# EAGLE board PinguiBot1.0 (EAGLE 5.11)
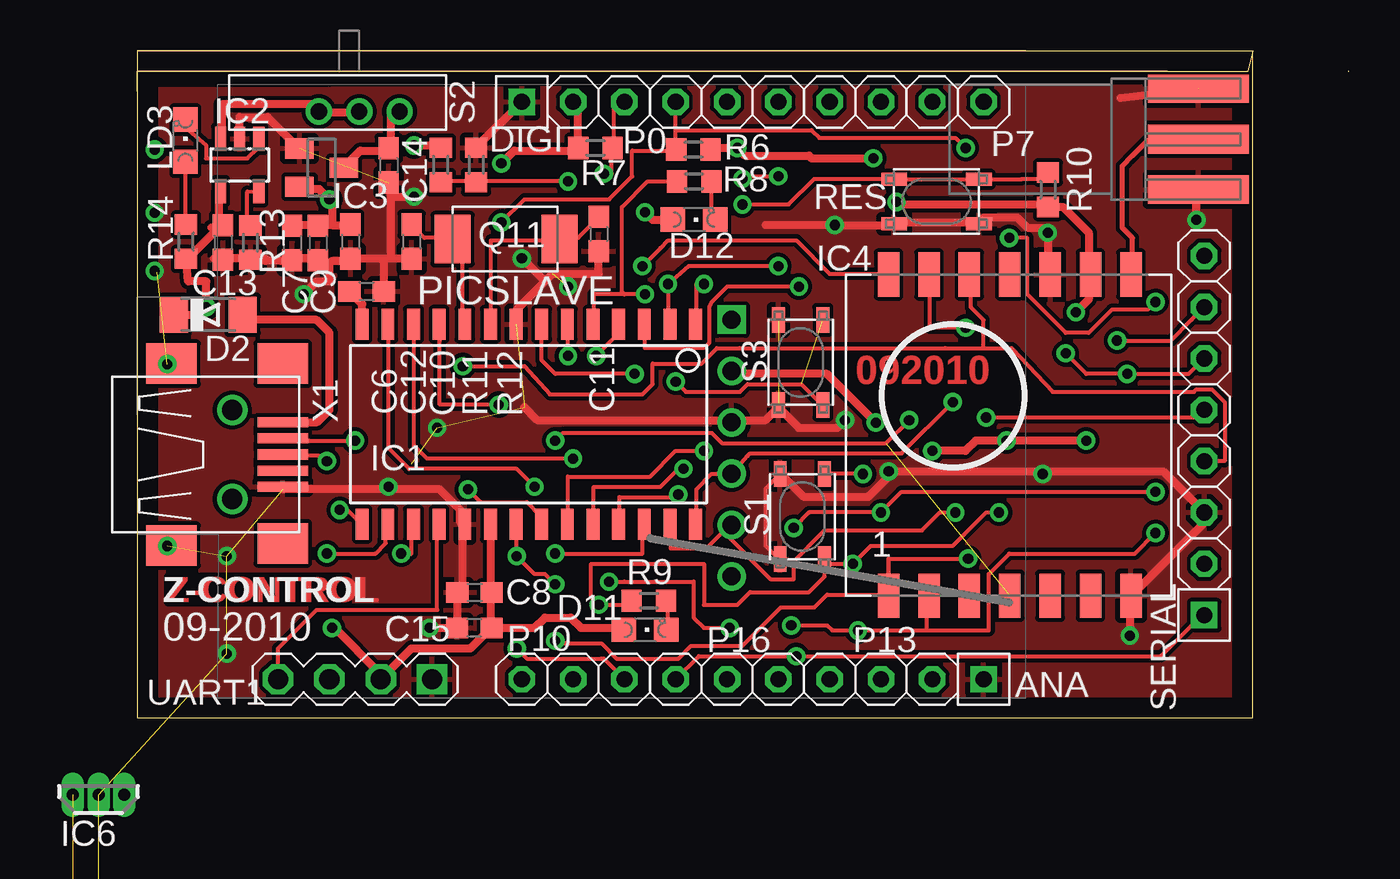
[diagram p0: board, top side]
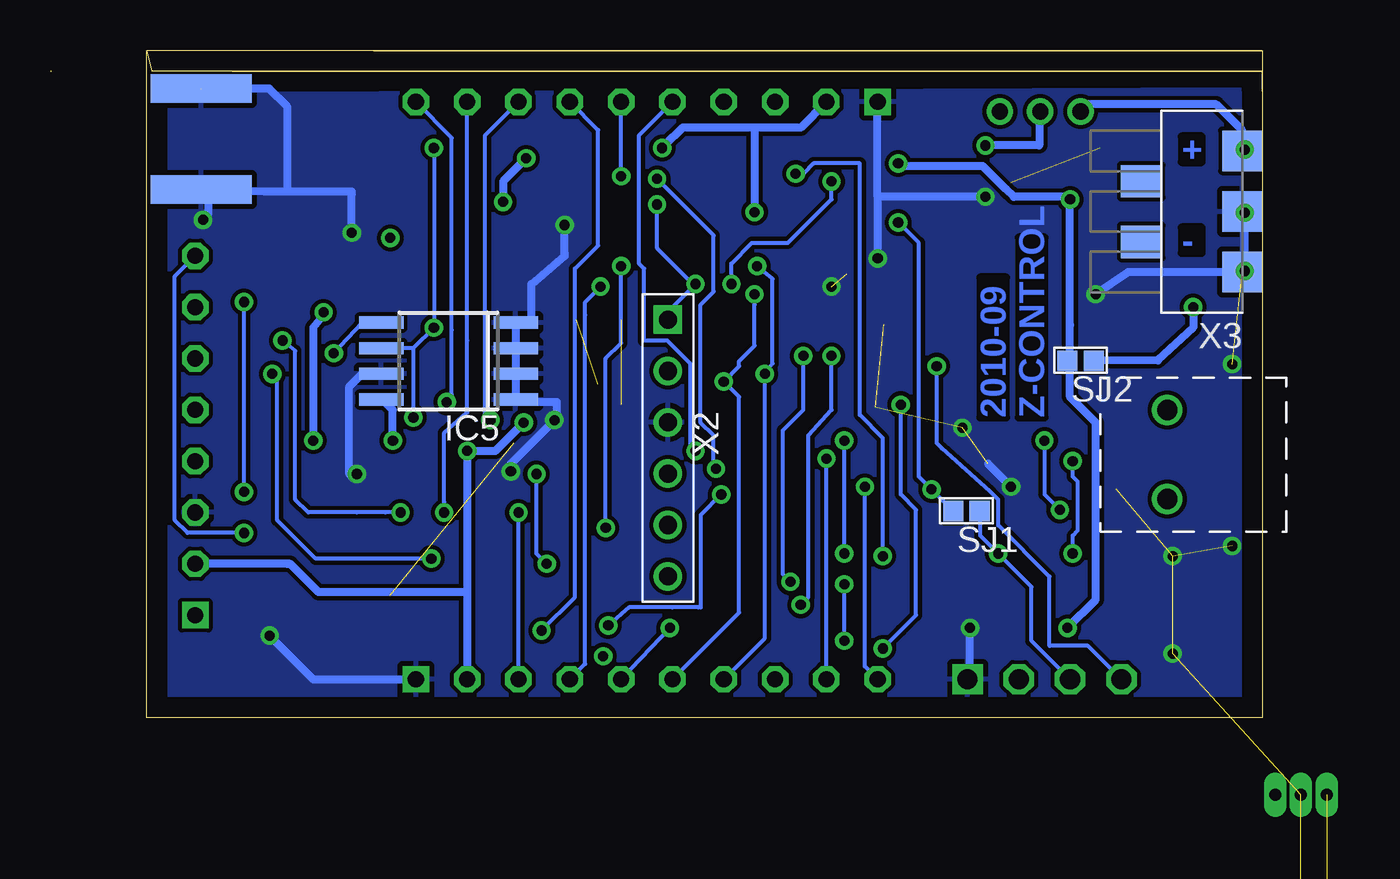
[diagram p1: board, bottom side, seen from below]

Size 60 x 33.02 mm. Coordinates in mm from the lower left corner, seen from the top.
Outline: 0,31 0,32
Outline: 0,32 0,31
Outline: 0,31 0,22 0,20 0,19 0,10 0,7 0,6 0,0 44.07,0 55,0 55.24,0 55.24,33.02
Outline: 55.24,33.02 55,32
Outline: 0,33 0,32
Outline: 0,33.02 55.24,33.02
Outline: 59.95,32 60,32 59.95,32
Copper layers (1*16): Top 0.035mm / dielectric 1.5mm / Bottom 0.035mm
Design rules "10mils_olimex *": minimum track width 8mil, minimum drill 19mil, track to track 8mil, track to pad 8mil, pad to pad 10mil, via to via 10mil, smd to smd 10mil, copper to edge 40mil, drill to drill 10mil, minimum pad ring 10mil, minimum via ring 8mil, stop-mask expansion 0mil, vias tented up to drill 0mil, thermal gap 10mil
Net classes: 0 default: width 0.203 mm, drill 0.254 mm, clearance 0.203 mm; 1 POWER: width 0.406 mm, drill 0.254 mm, clearance 0.203 mm
Milling: 4 lines

## Footprints (pad centres in the part's own frame; a part is rotated, then mirrored left to right if it is on the bottom)
1X10/ROUND = drill 0.8 square: 1 0,0 | drill 0.8 octagon: 2 2.54,0; 3 5.08,0; 4 7.62,0; 5 10.16,0; 6 12.7,0; 7 15.24,0; 8 17.78,0; 9 20.32,0; 10 22.86,0
C0603 = smd 1.1 x 1: 1 -0.85,0; 2 0.85,0
MINIMELF = smd 1.4 x 1.8: A 1.7,0; C -1.7,0
CHIPLED_0805 = smd 1.2 x 1.2: A 0,-1.05; C 0,1.05
SO-28W = smd 0.635 x 1.524: 1 -7.62,-4.953; 2 -6.35,-4.953; 3 -5.08,-4.953; 4 -3.81,-4.953; 5 -2.54,-4.953; 6 -1.27,-4.953; 7 0,-4.953; 8 1.27,-4.953; 9 2.54,-4.953; 10 3.81,-4.953; 11 5.08,-4.953; 12 6.35,-4.953; 13 7.62,-4.953; 14 8.89,-4.953; 15 8.89,4.953; 16 7.62,4.953; 17 6.35,4.953; 18 5.08,4.953; 19 3.81,4.953; 20 2.54,4.953; 21 1.27,4.953; 22 0,4.953; 23 -1.27,4.953; 24 -2.54,4.953; 25 -3.81,4.953; 26 -5.08,4.953; 27 -6.35,4.953; 28 -7.62,4.953
SOT23-5 = smd 0.55 x 1.2: 1 -0.95,-1.3; 2 0,-1.3; 3 0.95,-1.3; 4 0.95,1.3; 5 -0.95,1.3
V-REG_SOT23 = smd 1 x 1.4: 1 -0.95,-1.1; 2 0.95,-1.1; 3 0,1.1
RFM12B = smd 1.067 x 2.184: 1 2.1,-15.9; 2 4.1,-15.9; 3 6.1,-15.9; 4 8.1,-15.9; 5 10.1,-15.9; 6 12.1,-15.9; 7 14.1,-15.9; 8 14.1,0; 9 12.1,0; 10 10.1,0; 11 8.1,0; 12 6.1,0; 13 4.1,0; 14 2.1,0
SO-08M = smd 0.6 x 2.2: 1 -1.905,-3.33; 2 -0.635,-3.33; 3 0.635,-3.33; 4 1.905,-3.33; 5 1.905,3.33; 6 0.635,3.33; 7 -0.635,3.33; 8 -1.905,3.33
SIP3-UA = drill 0.6 pad 0.7 long: 1 -1.27,0; 2 0,0; 3 1.27,0
MULTIWATT-15 = drill 1.2 long: 1 -8.89,-7.62; 2 -7.62,-2.54; 3 -6.35,-7.62; 4 -5.08,-2.54; 5 -3.81,-7.62; 6 -2.54,-2.54; 7 -1.27,-7.62; 8 0,-2.54; 9 1.27,-7.62; 10 2.54,-2.54; 11 3.81,-7.62; 12 5.08,-2.54; 13 6.35,-7.62; 14 7.62,-2.54; 15 8.89,-7.62
DIL28-3 = drill 0.813 long: 1 -16.51,-3.81; 2 -13.97,-3.81; 3 -11.43,-3.81; 4 -8.89,-3.81; 5 -6.35,-3.81; 6 -3.81,-3.81; 7 -1.27,-3.81; 8 1.27,-3.81; 9 3.81,-3.81; 10 6.35,-3.81; 11 8.89,-3.81; 12 11.43,-3.81; 13 13.97,-3.81; 14 16.51,-3.81; 15 16.51,3.81; 16 13.97,3.81; 17 11.43,3.81; 18 8.89,3.81; 19 6.35,3.81; 20 3.81,3.81; 21 1.27,3.81; 22 -1.27,3.81; 23 -3.81,3.81; 24 -6.35,3.81; 25 -8.89,3.81; 26 -11.43,3.81; 27 -13.97,3.81; 28 -16.51,3.81
ABR3 = smd 1.8 x 2.4: 1 -0.6,0; 2 4.7,0
R0603 = smd 1 x 1.1: 1 -0.85,0; 2 0.85,0
TVAF11 = smd 1.27 x 0.635: 1 0,0; 2 4.2,0; 3 0,2.2; 4 4.2,2.2
COMU_MSE12D18 = drill 0.8 round: 1 0,0; 2 2,0; 3 4,0
1X08/ROUND = drill 0.8 square: 1 0,0 | drill 0.8 octagon: 2 2.54,0; 3 5.08,0; 4 7.62,0; 5 10.16,0; 6 12.7,0; 7 15.24,0; 8 17.78,0
SJ-SMALL = smd 1 x 1: 1 -0.654,0; 2 0.654,0
SMD_SMA = smd 1.44 x 5: CNTR 4.7,-2.6 | smd 1.4 x 5 bottom: GND 2.2,-2.6; GND2 7.2,-2.6 | smd 1.4 x 5: GND3 2.2,-2.6; GND4 7.196,-2.603
1X04/90ROUND = drill 1 square: 1 -3.81,0 | drill 1 octagon: 2 -1.27,0; 3 1.27,0; 4 3.81,0
USB-MB-S = smd 2.5 x 0.5: D+ 2.5,0; D- 2.5,0.8; GND 2.5,-1.6; ID 2.5,-0.8; VBUS 2.5,1.6 | smd 2.5 x 2: P$1 -3,-4.5; P$2 -3,4.5; P$3 2.5,-4.4; P$4 2.5,4.5 | drill 1 round: P$5 0,2.2; P$6 0,-2.2
PIN1X6_ROUND = drill 0.9 square: 1 0,0 | drill 0.9 round: 2 2.54,0; 3 5.08,0; 4 7.62,0; 5 10.16,0; 6 12.7,0
BAT_3P = smd 2 x 2: + 0,0; - 0,6; GND 0,3 | smd 2 x 1.6: P$4 5,1.5; P$5 5,4.5

## Placement (x,y rotation side)
ANA  [1X10/ROUND]  41.91,1.91 180 top
C6  220nF  [C0603]  10.56,23.56 270 top
C7  4uF  [C0603]  7.68,23.5 270 top
C8  4uF  [C0603]  16.71,6.2 180 top
C9  4uF  [C0603]  8.95,23.5 270 top
C10  20p  [C0603]  13.59,23.56 270 top
C11  20p  [C0603]  22.86,23.94 270 top
C12  220n  [C0603]  11.37,21.1 0 top
C13  1uF  [C0603]  4.26,23.52 270 top
C14  100nF  [C0603]  12.46,27.33 270 top
C15  220n  [C0603]  16.7,4.45 180 top
D2  [MINIMELF]  3.52,19.95 0 top
D11  [CHIPLED_0805]  25.15,4.35 270 top
D12  [CHIPLED_0805]  27.57,24.65 270 top
DIGI  [1X10/ROUND]  19.05,30.48 0 top
IC1  PIC18F2550SO  [SO-28W]  20.04,14.53 180 top
IC2  LTC4054  [SOT23-5]  5.09,27.35 180 top
IC3  MCP1700-33  [V-REG_SOT23]  9.14,27.23 270 top
IC4  RFM12B  [RFM12B]  35.1,21.93 0 top
IC5  DS28CN01  [SO-08M]  40.3,17.65 90 bottom
IC6  A1203UA  [SIP3-UA]  -1.91,-3.81 0 top  (outside the outline)
IC7  A1203UA  [SIP3-UA]  -1.91,-10.16 0 top  (outside the outline)
IC8  A1203UA  [SIP3-UA]  -1.91,-16.51 0 top  (outside the outline)
IC9  A1203UA  [SIP3-UA]  -1.91,-22.86 0 top  (outside the outline)
IC10  L298  [MULTIWATT-15]  5.71,-28.57 0 top  (outside the outline)
IC11  PIC18F2550_28DIP  [DIL28-3]  15.88,-49.53 0 top  (outside the outline)
LD3  [CHIPLED_0805]  2.4,28.56 0 top
Q11  20mhz  [ABR3]  20.32,23.68 180 top
R6  10k  [R0603]  27.55,28.12 0 top
R7  10k  [R0603]  22.7,28.19 180 top
R8  1k  [R0603]  27.58,26.54 0 top
R9  1k  [R0603]  25.34,5.79 0 top
R10  10k  [R0603]  45.1,26.13 270 top
R11  100k  [R0603]  15.04,27.36 270 top
R12  100k  [R0603]  16.79,27.36 90 top
R13  1k  [R0603]  5.62,23.51 270 top
R14  1k  [R0603]  2.43,23.56 270 top
RES  SW-TVAF11  [TVAF11]  37.48,24.45 0 top
S1  SW-TVAF11  [TVAF11]  31.84,12.05 270 top
S2  [COMU_MSE12D18]  9,30 0 top
S3  SW-TVAF11  [TVAF11]  31.75,19.68 270 top
SERIAL  [1X08/ROUND]  52.83,5.08 90 top
SJ1  [SJ-SMALL]  14.65,10.23 180 bottom
SJ2  [SJ-SMALL]  9,17.67 180 bottom
U$1  SMD_SMA  [SMD_SMA]  49.93,23.93 90 top
UART1  [1X04/90ROUND]  10.79,1.91 180 top
X1  USB-MB-S  [USB-MB-S]  4.71,13.03 0 top
X2  [PIN1X6_ROUND]  29.43,19.7 270 bottom
X3  [BAT_3P]  1,28.05 180 bottom

## Library data of the parts
ANA DIGI SERIAL UART1 X2 X3 = pinhead
C6-C15 R6-R14 = rcl
D2 = diode
D11 D12 LD3 = led
IC1 = microchip-dspic
IC2 Q11 RES S1-S3 = rolf_lib1
IC3 = altiosd3_1.0cdoc
IC4 = HopeRF
IC5 = microchip-5
IC6-IC9 = allegro; OC_FARNELL: 1521672; OC_NEWARK: unknown
IC10 = st-microelectronics; MPN: L298N; OC_FARNELL: 1589425; OC_NEWARK: 32M1527
IC11 = microchip; MF: MICROCHIP; MPN: PIC18F2550-I/SP; OC_FARNELL: 1523822; OC_NEWARK: 80K6054
SJ1 SJ2 = jumper
U$1 = AirwaveRFModules
X1 = con-usb

## Nets
+5V [POWER]: ANA.2 C6.1 C7.1 C8.1 C9.1 C15.1 D11.A D12.A DIGI.2 IC1.20 IC3.2 IC4.9 IC5.8 R6.2 R7.2 R10.2 SERIAL.2 SJ2.2 UART1.2 X2.2
BAT [POWER]: IC2.3 R11.1 S2.1 S2.2 X3.+
C-LIM: IC2.5 R13.1
D+: IC1.16 X1.D+
D-: IC1.15 X1.D-
GND [POWER]: ANA.1 C6.2 C7.2 C8.2 C9.2 C10.2 C11.2 C12.2 C13.2 C14.2 C15.2 DIGI.1 IC1.8 IC1.19 IC2.2 IC3.1 IC4.7 IC4.10 IC5.1 IC5.2 IC5.3 IC5.4 IC5.7 IC6.2 IC7.2 IC8.2 IC9.2 IC10.8 R12.2 R13.2 RES.1 RES.2 S1.1 S1.2 S3.1 S3.2 SERIAL.3 U$1.GND U$1.GND2 U$1.GND3 U$1.GND4 UART1.1 X1.GND X2.3 X3.- X3.GND
MCLR: IC1.1 R10.1 RES.3 RES.4 X2.1
N$4: C12.1 IC1.14
N$8: C11.1 IC1.9 Q11.1
N$9: C10.1 IC1.10 Q11.2
N$16: IC4.8 U$1.CNTR
N$19: D11.C R9.2
N$20 [POWER]: C14.1 IC3.3 S2.3
N$21: LD3.A R14.1
N$22: IC2.1 LD3.C
N$29: D12.C R8.2
P0/SDA: DIGI.3 IC1.21 IC4.1 IC5.5 R7.1 SERIAL.6
P1/SCL: DIGI.4 IC1.22 IC4.13 IC5.6 R6.1 SERIAL.5 SJ1.2
P2: DIGI.5 IC1.23
P3: DIGI.6 IC1.24
P4: DIGI.7 IC1.25 IC4.2 SERIAL.8
P5: DIGI.8 IC1.26 IC4.4
P6: DIGI.9 IC1.27 X2.5
P7: DIGI.10 IC1.28 X2.4
P8/TX: IC1.17 SJ1.1 UART1.3
P9/RX: IC1.18 IC4.12 SERIAL.4 UART1.4
P10: ANA.8 IC1.11
P11: ANA.9 IC1.12
P12: ANA.10 IC1.13
P13: ANA.3 IC1.2 R11.2 R12.1
P14: ANA.4 IC1.3
P15: ANA.5 IC1.4
P16: ANA.6 IC1.5 R8.1 S3.3 S3.4
P17/SS: ANA.7 IC1.7 IC4.14 SERIAL.1
RA4: IC1.6 R9.1 S1.3 S1.4 SERIAL.7
USBPWR [POWER]: D2.A X1.VBUS
VBUS [POWER]: C13.1 D2.C IC2.4 R14.2 SJ2.1
VCC: IC6.1 IC7.1 IC8.1 IC9.1 IC10.9
VDD: IC11.20
VS: IC10.4
VSS: IC11.8 IC11.19

## Tracks (layer width: path | path; a pad name or v marks a point on that pad's centre or on a via)
+5V  (via drill 0.5)
  Top 0.406: v39.37,13.21 41.02,13.21 41.53,13.72 v43.05,13.72 v46.99,13.72 | C15.1 17.53,4.45 17.53,6.1 C8.1 17.53,6.35 17.53,9.53 IC1.20 | C15.1 17.65,4.45 19.68,4.45 20.19,4.95 21.46,4.95 21.97,4.45 | C15.1 17.4,4.32 16.51,3.43 13.59,3.43 UART1.2 12.06,2.16 9.78,4.45 v9.65,4.45 | C7.1 7.37,24.38 8.89,24.38 C9.1 9.14,24.38 9.65,24.38 | 9.65,24.38 10.54,24.38 C6.1 | IC3.2 8.13,26.16 9.02,26.16 v9.53,25.65 9.65,25.53 9.65,24.51 9.65,24.38 | DIGI.2 21.84,30.48 R7.2 21.72,28.07 18.67,28.07 v18.03,27.43 | v25.15,25.02 25.4,24.77 25.53,24.64 26.42,24.64 D12.A | v36.58,14.61 34.16,17.02 29.59,17.02 29.46,17.14 X2.2 | R6.2 28.45,28.19 v29.72,28.19 29.84,28.07 30.1,27.81 33.27,27.81 33.4,27.69 v36.45,27.69 | v37.59,25.53 37.72,25.4 45.09,25.4 R10.2 45.84,25.28 47.12,24 47.12,22.86 IC4.9 47.12,21.84 47.12,21.59 47.12,20.7 v46.48,20.07 | 21.97,4.45 22.54,4.45 | 21.97,4.45 22.54,4.45 | 21.97,4.45 22.54,4.45 | 21.97,4.45 22.54,4.45 | 21.97,4.45 22.54,4.45 | 22.54,4.45 22.73,4.45 | 21.97,4.45 22.73,4.45 | 21.97,4.45 22.54,4.45 | 22.54,4.45 22.73,4.45 | 22.73,4.45 24.13,4.45 D11.A
  Bottom 0.406: v43.05,13.72 43.05,15.24 43.56,15.75 IC5.8 | 39.37,6.22 v39.37,13.21 37.97,13.21 37.47,13.72 36.7,14.48 v36.58,14.61 | 39.37,6.22 ANA.2 | SERIAL.2 48.26,7.62 48.13,7.62 47.37,6.86 46.74,6.22 40.13,6.22 39.37,6.22 | v25.15,25.02 25.15,26.67 25.15,29.21 | DIGI.2 22.86,29.21 25.15,29.21 | v18.03,27.43 18.03,27.3 13.84,27.3 12.7,26.16 12.32,25.78 9.65,25.78 v9.53,25.65 9.53,19.43 9.53,17.91 9.78,17.78 SJ2.2 9.53,17.54 9.53,15.88 8.26,14.61 8.26,14.1 8.26,5.84 v9.65,4.45 | 29.59,28.32 28.7,29.21 25.15,29.21 | 29.59,28.32 v29.72,28.19 29.59,28.32 | v46.48,20.07 46.48,19.94 46.99,19.3 46.99,17.02 46.99,16.64 46.99,16.26 v46.99,13.72 | v36.45,27.69 37.59,26.54 v37.59,25.53
BAT  (via drill 0.5)
  Top 0.406: v13.72,28.32 14.99,28.32 R11.1 | IC2.3 4.18,28.7 4.18,30.35 8.64,30.35 8.89,30.1 S2.1 9.14,29.97 10.92,29.97 S2.2
  Bottom 0.406: v13.72,28.32 11.05,28.32 11.05,29.97 S2.2 | X3.+ 1,29.07 2.29,30.35 8.65,30.35 S2.1
C-LIM
  Top 0.203: R13.1 5.46,24.38 5.46,26.04 IC2.5
D+  (via drill 0.5)
  Top 0.203: v9.4,8.13 11.81,8.13 12.32,8.64 12.32,9.53 IC1.16 | v9.4,12.7 9.27,12.7 9.02,12.95 7.11,12.95 X1.D+
  Bottom 0.203: v9.4,8.13 9.4,9.02 9.14,9.27 9.14,11.68 9.4,11.94 v9.4,12.7
D-  (via drill 0.5)
  Top 0.203: v10.03,10.29 10.41,10.29 11.05,9.65 IC1.15 | v10.79,13.72 8.51,13.72 7.24,13.72 X1.D-
  Bottom 0.203: v10.03,10.29 10.79,11.05 v10.79,13.72
GND  (via drill 0.5)  (16 unrouted)
  Top 0.203: S1.2 31.77,7.86 31.11,8.51 31.11,11.33 S1.1
  Top 0.406: 12.45,11.3 14.99,11.3 16,10.29 16,9.65 IC1.19 16.13,9.53 16.13,6.35 15.88,6.35 C8.2 15.88,6.1 15.88,4.45 C15.2 15.75,4.45 v14.48,4.45 | 12.45,11.3 7.24,11.3 X1.GND | IC2.2 5.07,28.7 5.07,29.72 6.48,29.72 8,28.19 IC3.1 7.87,28.07 | C13.2 3.81,22.73 5.21,22.73 R13.2 5.33,22.61 6.35,22.61 | 9.53,22.48 9.53,21.59 8.89,21.59 v8.26,20.95 | 9.53,22.48 9.02,22.48 C9.2 8.89,22.73 7.37,22.73 C7.2 7.11,22.61 6.35,22.61 | 9.53,22.48 9.65,22.61 10.54,22.61 C6.2 10.67,22.73 12.06,22.73 | 12.06,22.73 12.57,22.73 | 12.57,22.73 13.59,22.73 C10.2 | 12.57,25.78 12.57,22.86 12.57,22.73 | 12.57,25.78 12.57,26.42 C14.2 | 6.35,22.61 6.35,22.73 | DIGI.1 16.89,28.32 R12.2 | 20.19,21.59 18.8,20.19 18.8,19.56 IC1.8 | 20.19,21.59 20.57,21.97 22.86,21.97 22.86,22.99 C11.2 | v19.05,22.73 20.07,21.72 20.19,21.59 | v13.72,25.78 12.7,25.78 12.57,25.78 | 12.45,11.3 v12.45,11.43 | C12.2 12.22,22.58 12.06,22.73 | IC4.10 45.09,21.97 v45.09,24 45.09,24.26 44.07,24.26 43.56,24.77 41.91,24.77 41.78,24.64 RES.2 41.66,24.51 37.59,24.51 RES.1 37.41,24.38 v34.54,24.38 32.26,24.38 31.11,24.38 | v35.05,14.73 34.67,14.35 32.77,14.35 31.88,15.24 S3.2 31.75,15.37 31.11,14.73 29.59,14.73 X2.3 29.43,14.64 29.34,14.73 19.81,14.73 19.18,15.37 | S1.2 31.75,7.87 | 31.75,11.94 S1.1 32,11.94 33.02,10.92 36.2,10.92 37.34,12.06 | 37.34,12.06 37.47,12.19 44.83,12.19 | 44.83,12.19 50.8,12.19 52.7,10.29 SERIAL.3 52.83,9.65 49.28,6.1 IC4.7 49.15,5.98 v49.15,4.06 | v37.21,12.19 37.34,12.06 | 44.83,12.19 v44.83,12.06 | v52.45,24.64 52.45,26.04 U$1.GND | 48.7,30.67 U$1.GND4
  Bottom 0.406: IC5.7 43.69,17.02 44.58,17.02 44.7,16.89 45.21,16.38 45.21,12.06 44.96,11.81 44.83,11.94 v44.83,12.06 | UART1.1 14.48,2.03 v14.48,4.45 | 19.05,25.78 v19.05,22.73 | 19.05,25.78 DIGI.1 | 19.05,25.78 18.92,25.78 v13.72,25.78 13.59,25.65 | v12.45,11.43 13.59,12.57 | X3.GND v0.87,24.99 v0.87,22.11 X3.- 6.65,22.05 v8.26,20.95 | v37.21,12.19 37.21,12.57 35.18,14.61 v35.05,14.73 34.92,14.86 34.92,15.62 36.83,15.62 IC5.1 36.96,15.75 36.96,17.02 IC5.2 36.96,17.14 36.96,18.29 IC5.3 36.96,18.41 36.96,19.56 IC5.4 36.96,19.68 36.2,19.68 36.2,21.46 34.54,22.86 34.54,22.99 v34.54,24.38 | v52.45,24.64 52.2,24.89 52.2,25.91 U$1.GND 49.4,26.04 48.13,26.04 | v45.09,24 45.09,25.91 45.09,26.04 45.72,26.04 46.48,26.04 | 46.48,26.04 47.12,26.04 | 47.12,26.04 47.5,26.04 | 47.5,26.04 48.13,26.04 | ANA.1 46.99,1.91 v49.15,4.06 | U$1.GND4 49.17,31.14 48.26,30.23 48.26,26.16 48.13,26.04 | 47.12,26.04 47.5,26.04 | 46.48,26.04 47.12,26.04
  other vias: 4.45,3.17 4.45,8 1.5,17.5 1.5,8.5 14.86,14.35 21.34,21.34
  pour Top: 0.64,0.64 54.48,0.38 54.48,31.24 0.64,31.11
  pour Bottom: 0.64,0.64 0.64,31.11 54.48,30.86 54.48,0.38
MCLR  (via drill 0.5)
  Top 0.203: v28.07,21.46 27.69,21.46 27.69,19.56 IC1.1 | v29.97,25.4 31.62,25.4 | 31.62,25.4 32.26,25.4 | 31.62,25.4 32.26,25.4 | 31.62,25.4 32.26,25.4 | 32.26,25.4 33.53,26.67 37.46,26.67 RES.3 RES.4 43.8,26.65 43.81,26.67 44.79,26.67 R10.1
  Bottom 0.203: X2.1 29.34,19.81 29.34,20.19 v28.07,21.46 28.19,21.46 29.97,23.24 v29.97,25.4
N$4
  Top 0.406: IC1.14 11.14,20.47 C12.1
N$8
  Top 0.203: C11.1 22.86,24.77 21.84,23.75 20.95,23.75 Q11.1 20.83,23.62 17.53,23.62 17.53,19.56 IC1.9
N$9
  Top 0.203: C10.1 13.59,24.38 14.22,23.75 15.49,23.75 Q11.2 15.62,23.62 16.13,23.62 16.13,19.56 IC1.10
N$16
  Top 0.203: 50.04,28.57 50.55,28.57 U$1.CNTR
  Top 0.254: 50.04,28.57 49.28,27.81 48.77,27.3 48.77,24.26 49.28,23.75 49.28,22.01 IC4.8
N$19
  Top 0.203: R9.2 26.29,5.33 26.29,4.57 D11.C
N$20
  Top 0.406: S2.3 12.95,29.97 12.57,29.97 12.57,28.19 C14.1 12.32,28.07 11.05,28.07 10.29,27.3 IC3.3
N$21
  Top 0.203: R14.1 2.4,24.51 2.4,27.43 LD3.A
N$22
  Top 0.203: LD3.C 2.52,29.09 3.42,28.32 3.42,27.69 5.45,27.69 5.96,28.19 5.96,28.57 IC2.1
N$29
  Top 0.203: R8.2 28.45,26.54 28.45,24.77 28.57,24.77 D12.C
N$30  (via drill 0.5)
  other vias: 0.87,28.12
P0/SDA  (via drill 0.5)
  Top 0.203: DIGI.3 23.62,30.48 23.62,28.19 R7.1 23.5,28.19 23.5,26.92 v23.11,26.92 | 37.21,7.87 37.21,6.1 IC4.1 | 37.21,7.87 v41.15,7.87 | IC1.21 18.8,9.53 v18.8,8 19.68,7.11 20.19,7.11 v20.7,6.6 | SERIAL.6 52.07,17.02 v49.02,17.02 46.99,17.02 v45.97,18.03 45.59,18.03 | 37.21,7.87 37.21,6.22 37.08,6.1 34.16,6.1 33.53,5.46 32.26,5.46 31.88,5.46 29.97,3.56 28.57,3.56 27.43,3.56 26.8,2.92 23.75,2.92 22.99,3.68 20.83,3.68 | v20.7,3.81 20.83,3.68 | v20.7,3.81 21.34,3.68 | 20.83,3.68 21.34,3.68 | v20.7,3.81 21.34,3.68
  Bottom 0.203: 43.69,19.56 IC5.5 44.58,19.56 v45.97,18.03 | v23.11,26.92 22.73,26.92 22.23,27.43 19.94,27.43 19.94,14.99 18.8,13.84 v18.8,8 | v41.15,7.87 46.86,7.87 48.77,9.78 48.77,16.76 v49.02,17.02 | v20.7,3.81 v20.7,6.6
P1/SCL  (via drill 0.5)
  Top 0.203: v16.38,11.3 17.02,10.67 19.3,10.67 19.94,10.03 19.94,9.65 IC1.22 | 26.67,29.08 DIGI.4 | 26.67,29.08 26.67,28.19 R6.1 26.67,28.07 24.51,28.07 24.51,26.8 23.37,25.65 19.18,25.65 v18.03,24.51 | 26.67,29.08 33.4,29.08 33.78,28.7 40.51,28.7 v41.02,28.19 | v41.02,19.3 39.24,19.3 39.24,21.84 IC4.13 | SERIAL.5 52.45,14.86 v42.04,14.86
  Bottom 0.203: 42.04,18.29 43.56,18.29 IC5.6 | 42.04,18.29 v42.04,14.86 | SJ1.2 15.37,10.29 v16.38,11.3 17.02,11.94 17.02,23.5 v18.03,24.51 | 42.04,18.29 v41.02,19.3 v41.02,28.19
P2  (via drill 0.5)
  Top 0.203: v28.07,13.21 26.67,13.21 25.4,11.94 21.34,11.94 21.34,9.65 IC1.23
  Bottom 0.203: v28.07,13.21 28.32,13.46 28.32,17.53 29.46,18.67 30.61,18.67 30.61,22.23 30.86,22.48 30.86,28.83 DIGI.5
P3  (via drill 0.5)
  Top 0.203: v27.05,12.32 26.8,12.32 25.91,11.43 22.61,11.43 22.61,9.65 IC1.24 | v29.97,26.67 30.1,26.8 v31.75,26.8
  Bottom 0.203: v27.05,12.32 27.18,12.45 27.18,13.97 27.81,14.61 27.81,20.45 27.18,21.08 27.18,23.88 v29.97,26.67 | v31.75,26.8 DIGI.6
P4  (via drill 0.5)
  Top 0.203: v26.8,11.05 26.67,10.92 23.88,10.92 23.88,9.65 IC1.25 | 39.12,4.32 39.12,5.97 IC4.2 | 39.12,4.32 v35.69,4.32 34.42,4.32 34.16,4.57 v32.38,4.57 | v50.42,9.14 49.4,8.13 43.18,8.13 42.16,7.11 42.16,4.32 39.12,4.32
  Bottom 0.203: v26.8,11.05 27.81,10.03 27.81,5.46 27.94,5.46 29.21,5.46 31.37,5.46 v32.38,4.57 | DIGI.7 32.89,29.08 32.89,23.37 34.04,22.23 34.04,12.57 34.04,5.97 v35.69,4.32 | SERIAL.8 53.85,21.84 53.85,9.78 53.21,9.14 v50.42,9.14
P5  (via drill 0.5)  (1 unrouted)
  Top 0.203: v20.7,8.13 25.02,8.13 25.02,9.53 IC1.26 | v20.7,13.72 21.08,14.1 28.45,14.1 28.96,13.59 37.08,13.59 v38.23,14.73
  Bottom 0.203: v20.7,8.13 v20.7,13.72 | v38.23,14.73 38.48,14.99 38.48,28.83 DIGI.8
P6  (via drill 0.5)
  Top 0.203: IC1.27 26.42,9.53 26.42,8.38 28.19,8.38 29.34,9.53 X2.5 29.08,9.14 31.37,6.86 32.51,6.86 32.51,7.75 33.91,9.14 | 33.91,9.14 34.04,9.27 | 34.04,9.27 38.86,9.27 39.75,10.16 v40.51,10.16 | 33.91,9.14 34.04,9.27
  Bottom 0.203: DIGI.9 39.37,18.67 39.37,15.11 40.51,14.1 40.51,10.67 v40.51,10.16
P7  (via drill 0.5)
  Top 0.203: 29.46,12.06 28.45,12.06 27.69,11.3 27.69,9.65 IC1.28 | 29.46,12.06 X2.4 29.46,12.06 | v40.39,15.62 37.85,13.08 30.73,13.08 30.35,13.08 30.23,12.95 29.46,12.06
  Bottom 0.203: DIGI.10 40.13,28.7 40.13,19.18 40.13,16 v40.39,15.62
P8/TX  (via drill 0.5)
  Top 0.203: v13.08,8.13 13.59,8.13 13.59,9.53 IC1.17
  Bottom 0.203: UART1.3 11.43,3.81 11.43,6.48 v13.08,8.13 13.97,9.02 13.97,10.16 SJ1.1
P9/RX  (via drill 0.5)
  Top 0.203: UART1.4 6.99,3.43 8.89,5.33 14.86,5.33 14.86,9.53 IC1.18 | v16.13,17.4 19.18,17.4 20.45,16 23.62,16 25.02,16 25.53,16.51 25.53,17.53 27.94,17.53 28.7,18.29 29.84,18.29 30.48,18.29 40.01,18.29 41.91,18.29 | SERIAL.4 53.85,12.7 53.85,15.62 53.21,16.26 52.45,16.26 52.32,16.13 46.23,16.13 45.34,16.13 43.31,18.29 41.91,18.29 | IC4.12 41.27,21.84 41.27,20.95 41.27,20.32 41.91,19.68 41.91,18.29
  Bottom 0.203: UART1.4 8.64,3.56 10.54,3.56 10.54,6.99 13.08,9.53 13.08,10.79 13.46,11.18 15.88,13.34 16.13,13.59 v16.13,17.4
P10  (via drill 0.5)
  Top 0.203: v17.91,15.49 14.99,15.49 14.99,18.41 14.99,18.67 14.99,19.05 14.99,19.43 IC1.11 | v18.8,3.43 19.3,2.92 22.99,2.92 23.11,2.92 ANA.8
  Bottom 0.203: v18.8,3.43 17.91,4.32 17.14,5.08 17.14,10.29 17.91,11.05 v17.91,15.49
P11  (via drill 0.5)
  Top 0.203: v21.59,12.83 14.35,12.83 13.72,13.46 13.72,14.99 13.72,17.14 13.72,18.03 13.72,18.16 13.72,18.67 13.72,19.43 IC1.12
  Bottom 0.203: ANA.9 v21.59,12.83
P12  (via drill 0.5)
  Top 0.203: v19.68,11.43 18.8,12.32 13.46,12.32 12.45,13.34 12.45,14.73 12.45,17.27 12.45,18.03 12.45,18.29 12.45,18.54 12.45,19.43 IC1.13
  Bottom 0.203: v19.68,11.43 19.68,2.54 ANA.10
P13  (via drill 0.5)
  Top 0.203: R11.2 15.11,26.54 16.76,26.54 R12.1 16.89,26.54 v21.34,26.54 | IC1.2 26.29,19.56 v26.29,21.46 27.3,22.35 v31.75,22.35 | v50.42,11.18 37.85,11.18 v36.83,10.16 33.27,10.16 v32.51,9.4 | v50.42,20.57 50.04,20.19 48.26,20.19 47.12,19.05 45.97,19.05 44.07,20.95 44.07,23.75 v43.18,23.75
  Bottom 0.203: ANA.3 v36.83,10.16 | v50.42,11.18 v50.42,20.57 | v26.29,21.46 26.29,21.59 26.29,22.48 25.27,23.5 23.5,23.5 21.34,25.65 v21.34,26.54 | v32.51,9.4 32.51,17.78 31.75,18.54 v31.75,22.35
P14  (via drill 0.5)
  Top 0.203: v32.77,21.34 29.21,21.34 28.45,20.57 28.32,20.32 28.32,18.54 28.07,18.29 25.15,18.29 25.15,19.43 IC1.3
  Bottom 0.203: ANA.4 33.53,2.67 33.53,19.94 33.53,20.57 33.27,20.83 v32.77,21.34
P15  (via drill 0.5)
  Top 0.203: v22.73,17.91 23.75,18.92 23.75,19.43 IC1.4 | v23.37,6.73 24.13,6.73 27.56,6.73 27.56,5.08 | 27.56,5.08 27.56,4.95 | 27.56,5.08 27.56,4.95 | 27.56,5.08 27.56,4.95 | 27.56,4.95 28.07,4.45 v29.34,4.45
  Bottom 0.203: v23.37,6.73 23.75,7.11 23.75,14.22 22.73,15.24 v22.73,17.91 | v29.34,4.45 ANA.5
P16  (via drill 0.5)  (1 unrouted)
  Top 0.203: 26.67,26.54 R8.1 25.27,26.54 24,25.27 24,21.08 24.13,20.95 | v25.15,20.95 24.13,20.95 | 24.13,20.95 22.61,20.95 22.61,19.56 IC1.5 | v26.67,16.64 27.18,16.13 29.84,16.13 30.23,16.51 32.89,16.51 33.91,15.49 S3.4
  Bottom 0.203: 25.15,20.45 25.15,18.41 25.91,17.65 25.91,17.4 v26.67,16.64 25.91,15.88 25.91,5.21 ANA.6 | 25.15,20.45 25.15,20.7 | 25.15,20.45 25.15,20.7 | 25.15,20.7 v25.15,20.95
P17/SS  (via drill 0.5)
  Top 0.203: 20.07,19.56 IC1.7 20.04,17.68 20.07,17.65 20.7,17.02 v24.64,17.02 | ANA.7 27.81,3.05 v32.64,3.05 50.67,3.05 52.7,5.08 SERIAL.1 | IC4.14 37.17,21.97 34.29,21.97 32.64,23.62 30.99,23.62 30.86,23.62 26.29,23.62 25.91,23.24 v25.02,22.35
  Bottom 0.203: ANA.7 24.64,3.94 24.64,8.76 v24.64,17.02 24.26,17.53 24.26,21.72 v25.02,22.35
RA4  (via drill 0.5)
  Top 0.203: v21.34,17.91 21.34,18.54 21.34,19.18 21.34,19.43 IC1.6 | R9.1 24.38,5.71 24.38,5.59 v22.86,5.59 22.48,5.97 22.48,7.62 23.5,7.62 28.07,7.62 28.07,5.59 29.72,5.59 30.1,5.97 30.35,6.22 33.27,6.22 34.04,6.99 34.05,7.23 34.05,7.42 | SERIAL.7 52.2,19.68 51.18,18.67 v48.51,18.67 | 34.05,7.42 34.04,7.75 S1.4 34.16,7.87 | S1.3 34.16,12.06 v35.94,12.06 | 34.05,7.42 33.99,7.62 v35.43,7.62 36.32,8.51 40.39,8.51 42.04,10.16 v42.67,10.16
  Bottom 0.203: v22.86,5.59 22.48,5.97 22.48,13.97 21.34,15.24 v21.34,17.91 | v48.51,18.67 47.88,18.16 47.88,10.79 47.24,10.16 44.83,10.16 43.43,10.16 v42.67,10.16 | v35.43,7.62 35.94,8.13 35.94,10.79 35.94,11.05 v35.94,12.06
USBPWR
  Top 0.406: X1.VBUS 8.91,14.63 9.53,15.24 9.53,19.05 8.89,19.68 5.49,19.68 D2.A
VBUS  (via drill 0.5)
  Top 0.406: IC2.4 4.06,26.04 4.06,24.38 C13.1 3.68,24.26 4.05,24.26 2.52,22.73 R14.2 2.54,21.59 3.43,21.59 v3.43,20.32 3.05,19.95 D2.C
  Bottom 0.406: SJ2.1 5.17,17.69 3.43,19.3 3.43,20.19 v3.43,20.32
VCC  (4 unrouted)
VSS  (1 unrouted)

## Text on the board
Top: 092010 | Z-CONTROL
Bottom: + | - | Z-CONTROL | 2010-09
tNames: P7 | P0 | PICSLAVE | Z-CONTROL | 09-2010 | P10 | P16 | P13
Document: + | D- | D+ | -
tDocu: NSEL | SCLK | SDI | NINT | GND | VCC | ANT | SDO | NIRQ | FSK | DCLK | CLK | NRES | GND